# EAGLE board sensor_tag (EAGLE 9.0.0)
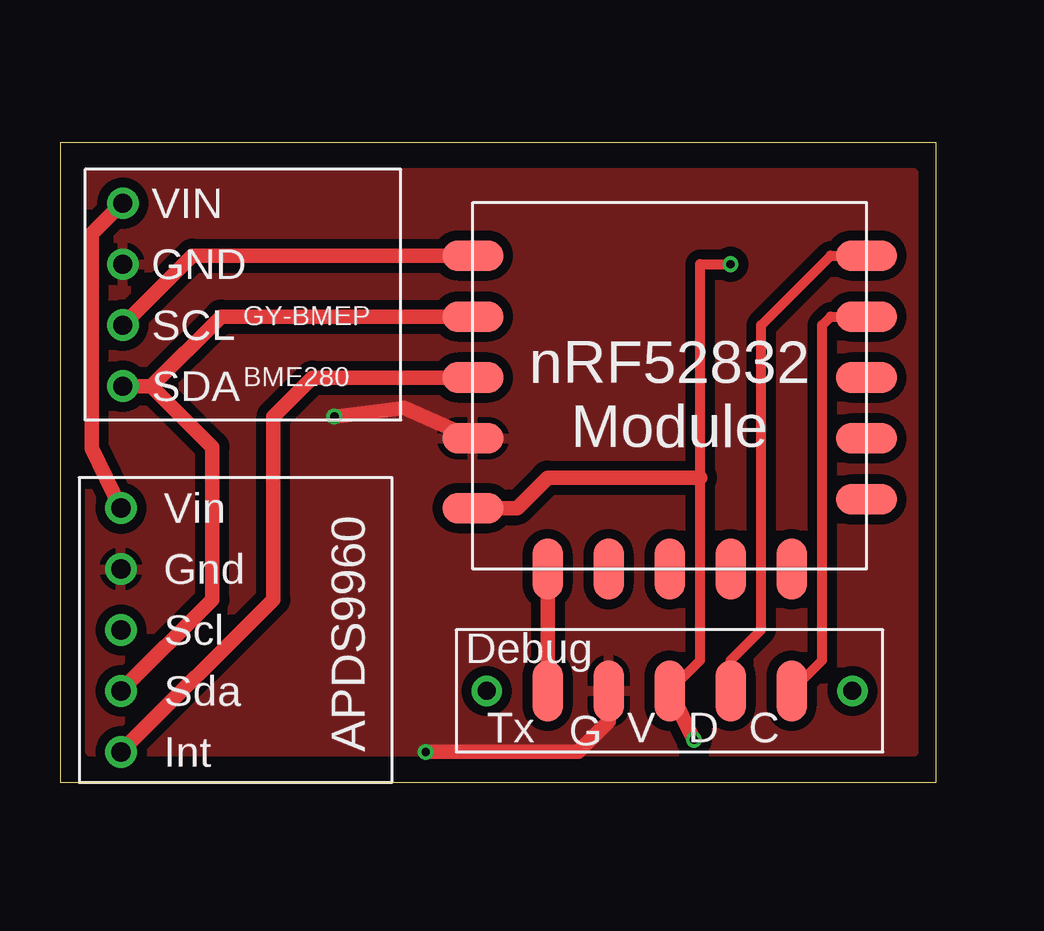
[diagram p0: board, top side]
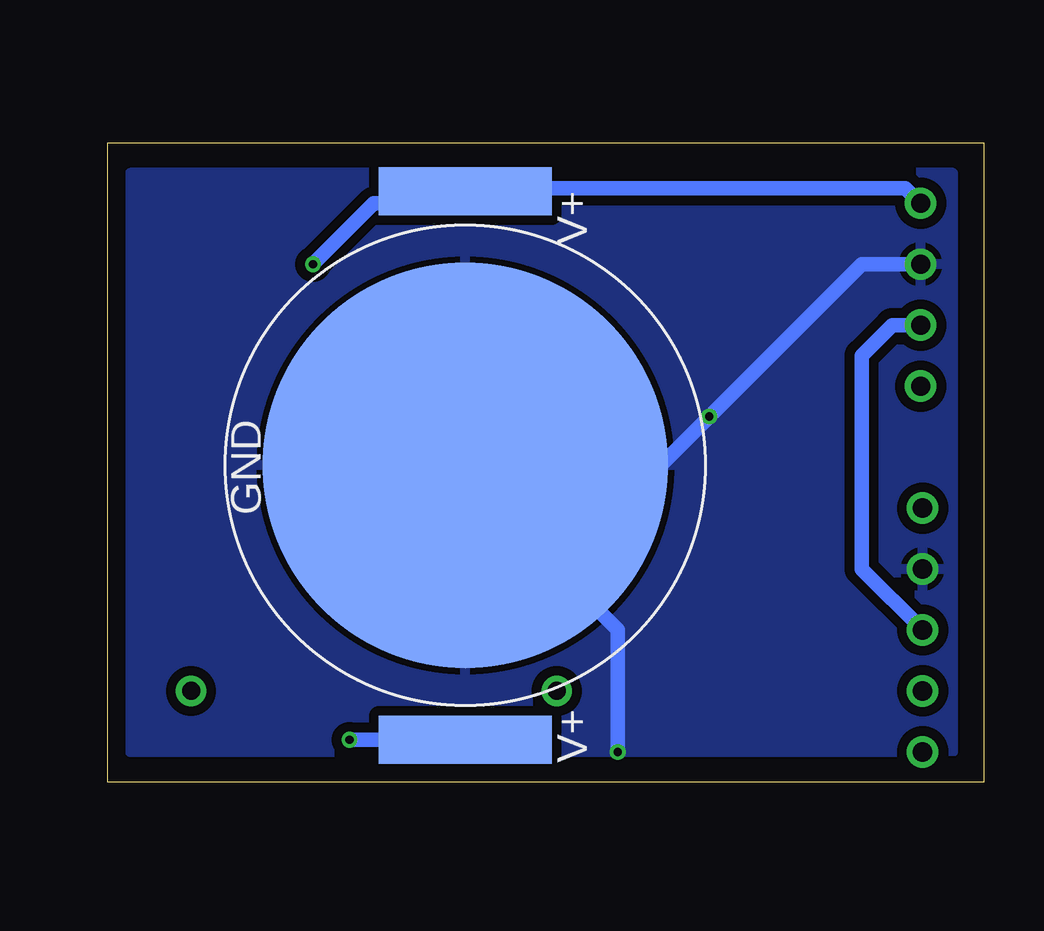
[diagram p1: board, bottom side, seen from below]

Size 36.5 x 26.66 mm. Coordinates in mm from the lower left corner, seen from the top.
Outline: 0,0 36.5,0 36.5,26.66 0,26.66 0,0
Copper layers (1*16): Top 0.035mm / dielectric 1.5mm / Bottom 0.035mm
Design rules "EagleRules": minimum track width 7mil, minimum drill 12mil, track to track 7mil, track to pad 7mil, pad to pad 7mil, via to via 7mil, smd to smd 0mil, copper to edge 20mil, drill to drill 10mil, minimum pad ring 10mil, minimum via ring 6mil, stop-mask expansion 2mil, vias tented up to drill 25mil, thermal gap 10mil

## Footprints (pad centres in the part's own frame; a part is rotated, then mirrored left to right if it is on the bottom)
GY-BMEP-NOHOLE = drill 0.8: GND -5,1.27; SCL -5,-1.27; SDA -5,-3.81; VIN -5,3.81
APDS9960-FULL = drill 0.8: GND 0,2.54; INT 0,-5.08; SCL 0,0; SDA 0,-2.54; VIN 0,5.08
NRF52832_MOD_SMALL = smd 2.54 x 1.27: GND -8.2,-3.45; P0_11 8.2,-5.99; P0_12 8.2,-3.45; P0_14 8.2,-0.91; P0_29 -8.2,4.17; P0_30 -8.2,1.63; P0_31 -8.2,-0.91; SWCLK 8.2,1.63; SWDIO 8.2,4.17; VCC -8.2,-6.35 | smd 1.27 x 2.54: P0_06 -5.08,-8.89; P0_07 -2.54,-8.89; P0_08 0,-8.89; P0_09 2.54,-8.89; P0_10 5.08,-8.89
CR2032_SMD = smd 16.9 x 16.9: GND 0,0 | smd 2 x 7.2: VCC_L -11.43,0; VCC_R 11.43,0
NRF_TAG_DEBUG = smd 1.27 x 2.54: GND -2.54,0; SWCLK 5.08,0; SWDIO 2.54,0; TX -5.08,0; VCC 0,0 | drill 0.75: P$6 7.62,0; P$7 -7.62,0

## Placement (x,y rotation side)
U$1  GY-BMEPGY-BMEP-NOHOLE  [GY-BMEP-NOHOLE]  7.62,20.32 0 top
U$2  APDS9960_MODULEAPDS9960-FULL  [APDS9960-FULL]  2.54,6.35 0 top
U$3  NRF52832_MODULENRF52832_MOD_SMALL  [NRF52832_MOD_SMALL]  25.4,17.78 0 top
U$4  CR2032  [CR2032_SMD]  21.59,13.21 270 bottom
U$5  NRF_TAG_DEBUG  [NRF_TAG_DEBUG]  25.4,3.81 0 top

## Library data of the parts
U$1 = GY-BMEP
U$2 = APDS9960
U$3 = nRF52832_module
U$4 = cr2032
U$5 = nrf_tag_debug

## Nets
GND: U$1.GND U$2.GND U$3.GND U$4.GND U$5.GND
INT: U$2.INT U$3.P0_31
SCL: U$1.SCL U$2.SCL U$3.P0_29
SDA: U$1.SDA U$2.SDA U$3.P0_30
SWCLK: U$3.SWCLK U$5.SWCLK
SWDIO: U$3.SWDIO U$5.SWDIO
TX: U$3.P0_06 U$5.TX
VCC: U$1.VIN U$2.VIN U$3.VCC U$4.VCC_L U$4.VCC_R U$5.VCC

## Tracks (layer width: path | path; a pad name or v marks a point on that pad's centre or on a via)
GND  (via drill 0.35)
  Top 0.61: U$3.GND 14.33,15.6 13.93,15.55 v11.43,15.24 | U$5.GND 22.86,2.54 21.59,1.27 v15.24,1.27
  Bottom 0.61: U$4.GND 20.32,12.7 | U$1.GND 5.08,21.59 v11.43,15.24 13.97,12.7 20.32,12.7 | v15.24,1.27 15.24,6.35 20.32,11.43 20.32,12.7
  pour Top (isolate 0.406): 1.27,25.4 35.56,25.4 35.56,1.27 1.27,1.27
  pour Bottom (isolate 0.406): 1.27,25.4 35.56,25.4 35.56,1.27 1.27,1.27
INT
  Top 0.61: U$2.INT 8.89,7.62 8.89,15.24 10.52,16.87 U$3.P0_31
SCL
  Top 0.61: U$1.SCL 5.52,21.95 U$3.P0_29
  Bottom 0.61: U$2.SCL 5.08,8.89 5.08,17.78 3.81,19.05 U$1.SCL
SDA
  Top 0.61: U$2.SDA 6.35,7.62 6.35,13.97 3.81,16.51 | 2.54,16.51 U$1.SDA 3.81,16.51 | 3.81,16.51 6.71,19.41 U$3.P0_30
SWCLK
  Top 0.406: U$5.SWCLK 31.75,5.08 31.75,19.05 32.11,19.41 U$3.SWCLK
SWDIO
  Top 0.406: U$5.SWDIO 27.94,5.08 29.21,6.35 29.21,19.05 32.11,21.95 U$3.SWDIO
TX
  Top 0.61: U$3.P0_06 U$5.TX
VCC  (via drill 0.35)
  Top 0.406: U$5.VCC 26.67,5.08 26.67,12.7 26.67,21.59 v27.94,21.59
  Top 0.61: U$2.VIN 1.32,13.92 1.32,22.86 2.59,24.13 U$1.VIN | v26.42,1.78 U$5.VCC | U$3.VCC 19.05,11.43 20.32,12.7 26.67,12.7
  Bottom 0.61: U$4.VCC_R v26.42,1.78 | U$1.VIN 3.25,24.77 20.95,24.77 U$4.VCC_L 22.1,24.13 25.4,24.13 v27.94,21.59